# Altium PCB InvertorPCB.PcbDoc
Units mm, origin at the board's own origin, x right, y up, seen from the top; angles counter-clockwise.
Board outline 160.39 x 100.35 mm, 2 copper layers (Top Layer, Bottom Layer); 110 components, 60 nets, 326 pads, 6 vias.
Unrouted connection lines stored in the file: 91.
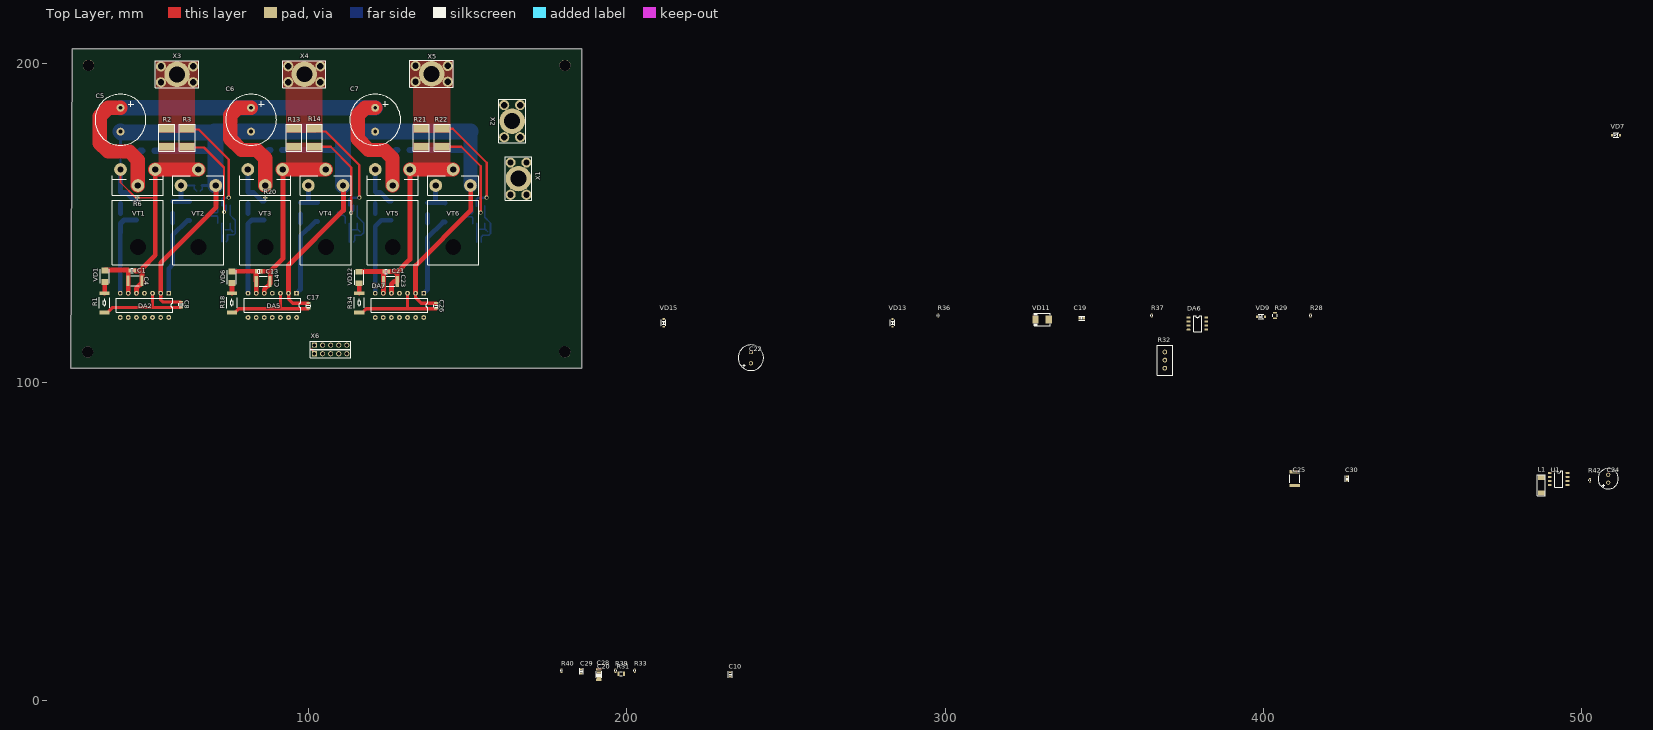
[diagram p0: Top Layer view]
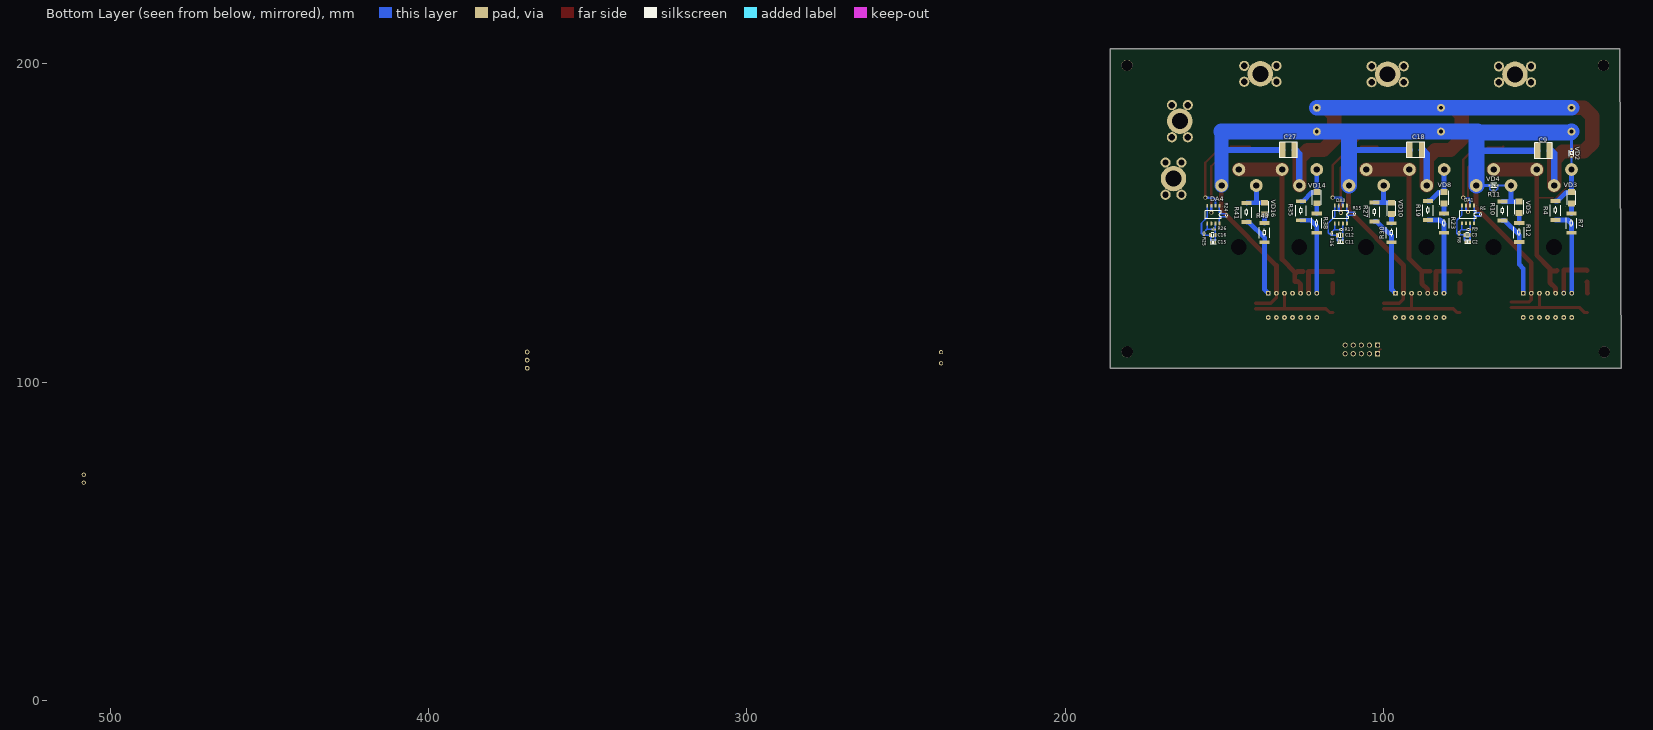
[diagram p1: Bottom Layer view, seen from below]

## Layer stack, top to bottom
Top Solder: solder mask 0.0102, Solder Resist, Dk 3.5
Top Layer: signal copper 0.0356
Dielectric 1: dielectric 0.32, FR-4, Dk 4.8
Bottom Layer: signal copper 0.0356
Bottom Solder: solder mask 0.0102, Solder Resist, Dk 3.5

## Board outline
25.807,204.75 185.8,204.75 185.8,104.4 25.411,104.4

## Design rules (kind name [scope] priority, off if disabled: settings)
Clearance Clearance_1 [InNetClass('Transistor')] p1: gap=1 ignorepadtopadclearanceinfootprint=FALSE
Clearance [All] p2: gap=0.254 ignorepadtopadclearanceinfootprint=FALSE except(0.127: SMDPad-SMDPad; 0.2: Track-Track)
PlaneConnect [All] p1: planeconnectstyle=Direct reliefexpansion=0.508 reliefentries=4 reliefconductorwidth=0.254 reliefairgap=0.254
PolygonConnect [All] p1: connectstyle=Direct reliefconductorwidth=0.254 reliefentries=4 polygonreliefangle="90 Angle" airgapwidth=0.254
RoutingVias [All] p1: holewidth=0.711 width=1.27 viastyle="Through Hole" minholewidth=0.2 minwidth=0.4 maxholewidth=0.711 maxwidth=1.27
SolderMaskExpansion [All] p1: expansion=0.102 istentingtop=FALSE
Width [All] p1: maxlimit=20 minlimit=0.2 preferedwidth=0.254
29 further rules are at their usual default settings.

## Components (designator, comment, footprint, x,y, rotation, side; value= is the part's Value field where it differs from the comment)
C1 "Capacitor" 0805 44.675,135.184 r180 top value="0.1 мкФ"
C2 "Capacitor" C0603C 73.585,144.12 r180 bottom value="0.1 мкФ"
C3 "Capacitor" 0805 73.74,146.301 r180 bottom value="10 мкФ"
C4 "Capacitor" 1812С 45.575,131.951 r0 top value="2.2 мкФ"
C5 "Сapacitor pol" CAP-10 41,182.5 r270 top value=470мкФ
C6 "Сapacitor pol" CAP-10 82,182.5 r270 top value=470мкФ
C7 "Сapacitor pol" CAP-10 121,182.5 r270 top value=470мкФ
C8 "Capacitor" 0805 59.981,124.453 r270 top value="0.47 мкФ"
C9 "Capacitor" 2220С 49.778,172.702 r180 bottom value="4.7 мкФ"
C10 "Capacitor" C0603C 232.5,8.25 r90 top value="0.1 мкФ"
C11 "Capacitor" C0603C 113.573,144.081 r180 bottom value="0.1 мкФ"
C12 "Capacitor" 0805 113.722,146.197 r180 bottom value="10 мкФ"
C13 "Capacitor" 0805 84.467,134.908 r180 top value="0.1 мкФ"
C14 "Capacitor" 1812С 85.796,131.712 r0 top value="2.2 мкФ"
C15 "Capacitor" C0603C 153.543,144 r180 bottom value="0.1 мкФ"
C16 "Capacitor" 0805 153.711,146.261 r180 bottom value="10 мкФ"
C17 "Capacitor" 0805 100,124 r270 top value="0.47 мкФ"
C18 "Capacitor" 2220С 89.9,173 r180 bottom value="4.7 мкФ"
C19 "Capacitor" C0603C 342.9,120.122 r0 top value="0.1 мкФ"
C20 "" C0805C 191.25,8 r90 top value=10nF
C21 "Capacitor" 0805 124.44,134.812 r180 top value="0.1 мкФ"
C22 "" CAP-8x12 239,107.75 r90 top value=220uF
C23 "Capacitor" 1812С 125.761,131.712 r0 top value="2.2 мкФ"
C24 "" CAP-К50-35 508.249,69.75 r90 top value=22uF
C25 "" C1812C 409.749,69.75 r90 top value=2.2uF
C26 "Capacitor" 0805 140.143,124 r270 top value="0.47 мкФ"
C27 "Capacitor" 2220С 129.875,173 r180 bottom value="4.7 мкФ"
C28 "Capacitor" C1206C 191.25,8.25 r90 top value=1нф
C29 "Capacitor" C0603C 185.75,9.25 r90 top value="0.1 мкФ"
C30 "Capacitor" C0603C 426.249,69.75 r90 top value="0.1 мкФ"
DA1 "AD623ARZ" SO8 73.5,152.75 r270 bottom
DA2 "IR2010PFB" DIP14 56.145,128.018 r270 top
DA3 "AD623ARZ" SO8 113.458,152.728 r270 bottom
DA4 "AD623ARZ" SO8 153.482,152.693 r270 bottom
DA5 "IR2010PFB" DIP14 96.3,128.004 r270 top
DA6 "LM393DT" SO8 379.222,118.471 r0 top
DA7 "IR2010PFB" DIP14 136.229,128.001 r270 top
L1 "" IND0488-G-E 487.249,65.25 r90 top value=22uH
R1 "Resistor" 2512R 36,125 r270 top value=100Ом
R2 "Resistor" 2816R 55.5,176.825 r90 top value=20мОм
R3 "Resistor" 2816R 61.897,176.825 r90 top value=20мОм
R4 "Resistor" 2512R 46,154 r270 bottom value=43Ом
R5 "Resistor" 0402R 69.5,152.75 r90 bottom value=11кОм
R6 "Resistor" 0402R 46.263,158.023 r0 top value=10кОм
R7 "Resistor" 2512R 41,150 r270 bottom value=20Ом
R8 "Resistor" 0402R 76.269,146.844 r90 bottom value=20кОм
R9 "Resistor" 0402R 73.335,148 r180 bottom value=10кОм
R10 "Resistor" 2512R 62.631,153.841 r270 bottom value=43Ом
R11 "Resistor" 0402R 65.5,160 r0 bottom value=10кОм
R12 "Resistor" 2512R 57.434,147.097 r270 bottom value=20Ом
R13 "Resistor" 2816R 95.479,176.828 r90 top value=20мОм
R14 "Resistor" 2816R 101.938,176.828 r90 top value=20мОм
R15 "Resistor" 0402R 109.097,152.985 r90 bottom value=11кОм
R16 "Resistor" 0402R 116.229,146.771 r90 bottom value=10кОм
R17 "Resistor" 0402R 113.323,148 r180 bottom value=10кОм
R18 "Resistor" 2512R 76,125 r270 top value=100Ом
R19 "Resistor" 2512R 86.108,154 r270 bottom value=43Ом
R20 "Resistor" 0402R 86.455,157.978 r0 top value=10кОм
R21 "Resistor" 2816R 135.5,176.825 r90 top value=20мОм
R22 "Resistor" 2816R 142,176.825 r90 top value=20мОм
R23 "Resistor" 2512R 81,150 r270 bottom value=20Ом
R24 "Resistor" 0402R 149.326,152.514 r90 bottom value=11кОм
R25 "Resistor" 0402R 156.389,146.749 r90 bottom value=10кОм
R26 "Resistor" 0402R 153.343,148.067 r180 bottom value=10кОм
R27 "Resistor" 2512R 102.837,153.493 r270 bottom value=43Ом
R28 "Resistor" 0402R 414.782,121.011 r90 top value=10кОм
R29 "" C0805R 403.606,121.011 r90 top value=1.1k
R30 "Resistor" 2512R 97.491,147.011 r270 bottom value=20Ом
R31 "" C0805R 198.25,8.5 r0 top value=9.1k
R32 "pot" 3296W 369,107 r90 top
R33 "Resistor" 0402R 202.5,9.5 r90 top value=75кОм
R34 "Resistor" 2512R 116,125 r270 top value=100Ом
R35 "Resistor" 2512R 126,153.9 r270 bottom value=43Ом
R36 "Resistor" 0402R 297.815,121.011 r90 top value=10кОм
R37 "Resistor" 0402R 364.871,121.011 r90 top value=2.2кОм
R38 "Resistor" 2512R 121,150 r270 bottom value=20Ом
R39 "Resistor" 0402R 196.5,9.5 r90 top value=2.2кОм
R40 "Resistor" 0402R 179.5,9.5 r90 top value=2.2кОм
R41 "Resistor" 2512R 143.022,153.362 r270 bottom value=43Ом
R42 "Resistor" 0402R 502.499,69.25 r90 top value=10кОм
R43 "Resistor" 2512R 137.44,147.015 r270 bottom value=20Ом
U1 "LM22675MR-5.0" LM22675MR-5.0/NOPB 492.749,69.5 r0 top
VD1 "STPS2H100A" D0-124AC 36.103,133.354 r270 top
VD2 "BZX384-C18" SOD323 41,172 r90 bottom
VD3 "VS-10BQ040" D0-124AC 41,158 r90 bottom
VD4 "BZX384-C18" SOD323 65.45,161.85 r0 bottom
VD5 "VS-10BQ040" D0-124AC 57.434,154.999 r90 bottom
VD6 "STPS2H100A" D0-124AC 76,133 r270 top
VD7 "BZX384-C18" SOD323 510.7,177.63 r0 top
VD8 "VS-10BQ040" D0-124AC 81,157.966 r90 bottom
VD9 "BZX384-C18" SOD323 399.161,120.63 r0 top
VD10 "VS-10BQ040" D0-124AC 97.531,154.654 r90 bottom
VD11 "" DO-214AA 330.454,119.741 r0 top
VD12 "STPS2H100A" D0-124AC 115.952,132.945 r270 top
VD13 "BZX384-C18" SOD323 283.464,118.725 r90 top
VD14 "VS-10BQ040" D0-124AC 121,158.03 r90 bottom
VD15 "BZX384-C18" SOD323 211.582,118.725 r90 top
VD16 "VS-10BQ040" D0-124AC 137.44,154.615 r90 bottom
VT1 "IRFP4710PBF" TO247-2 46.456,161.844 r180 top
VT2 "IRFP4710PBF" TO247-1 65.45,161.85 r180 top
VT3 "IRFP4710PBF" TO247-2 86.45,161.85 r180 top
VT4 "IRFP4710PBF" TO247-1 105.445,161.85 r180 top
VT5 "IRFP4710PBF" TO247-2 126.45,161.85 r180 top
VT6 "IRFP4710PBF" TO247-1 145.45,161.85 r180 top
X1 "Connector-1" PCBM4 166,164 r270 top
X2 "Connector-1" PCBM4 164,182.05 r270 top
X3 "Connector-1_1" PCBM4 58.75,196.75 r0 top
X4 "Connector-1_1" PCBM4 98.735,196.789 r0 top
X5 "Connector-1_1" PCBM4 138.719,196.913 r0 top
X6 "PLS-2x5" PLS-2x5 107,111.7 r180 top

## Footprints (in the part's own frame and the unit in brackets; to place one, negate y for a bottom-side part, rotate by r counter-clockwise, add the part's x,y. Pads: shape width x height; smd on the part's side, far side on the other; paste and mask are expansions set on the pad)
0402R [mm]
  rect 0.4x0.6 smd: 1(-0.5,0) 2(0.5,0)
  silkscreen extent -0.2,-0.3 0.2,0.3, body extent -0.52,-0.3 0.52,0.3, height 0.34
0805 [mm]
  rect 0.6x1.3 smd: 1(-0.875,0) 2(0.875,0)
  silkscreen extent -0.4,-0.7 0.4,0.7, body extent -1,-0.6 1,0.6, height 0.8
1812С [mm]
  rect 1x3.35 smd: 1(-2.175,0) 2(2.175,0)
  silkscreen extent -1.3,-1.58 1.3,1.58, body extent -2.25,-1.6 2.25,1.6, height 1
2220С [mm]
  rect 1.8x5 smd: 1(-1.9,0) 2(1.9,0)
  silkscreen extent -2.8,-2.5 2.8,2.5
2512R [mm]
  rect 1.2x3.2 smd: 1(-3,0) 2(3,0)
  silkscreen extent -1.73,-1.63 1.75,1.63, body extent -3.2,-1.6 3.2,1.6, height 0.55
2816R [mm]
  rect 2.45x4.7 smd: 1(-2.825,0) 2(2.825,0)
  silkscreen extent -4.2,-2.5 4.2,2.5
3296W [mm]
  round 1.5 hole 0.8: 1(2.54,0) 2(0,0) 3(-2.54,0)
  silkscreen extent -4.77,-2.45 4.72,2.37, body extent -4.77,-2.43 4.76,2.4, height 11.52
C0603C [mm]
  rect 0.5x0.8 smd: 1(-0.7,0) 2(0.7,0)
  silkscreen extent -0.97,-0.58 0.97,0.58, body extent -0.8,-0.4 0.8,0.4, height 0.5
C0805C [mm]
  rect 0.6x1.3 smd: 1(-0.875,0) 2(0.875,0)
  silkscreen extent -0.4,-0.7 0.4,0.7, body extent -1,-0.6 1,0.6, height 0.8
C0805R [mm]
  rect 0.6x1.3 smd: 1(-0.875,0) 2(0.875,0)
  silkscreen extent -0.4,-0.7 0.4,0.7, body extent -1,-0.6 1,0.6, height 0.5
C1206C [mm]
  rect 0.8x1.7 smd: 1(-1.6,0) 2(1.6,0)
  silkscreen extent -1,-0.9 1,0.9, body extent -1.7,-0.8 1.7,0.8, height 0.8
C1812C [mm]
  rect 1x3.35 smd: 1(-2.175,0) 2(2.175,0)
  silkscreen extent -1.3,-1.58 1.3,1.58, body extent -2.25,-1.6 2.25,1.6, height 1
CAP-8x12 [mm]
  round 1.3 hole 0.8: 1(-1.75,0) 2(1.75,0)
  silkscreen extent -4,-4 4,4
CAP-10 [mm]
  round 2.5 hole 1.2: 1(-3.75,0) 2(3.75,0)
  silkscreen extent -8,-8 8,8
CAP-К50-35 [mm]
  round 1.3 hole 0.8: 1(-1.25,0) 2(1.25,0)
  silkscreen extent -3.2,-3.2 3.2,3.2
D0-124AC [mm]
  rect 1.8x2.2 smd: A(1.8,0) C(-1.8,0)
  silkscreen extent -2.25,-1.4 2.25,1.4, body extent -2.47,-1.4 2.47,1.4, height 2.4
DIP14 [mm]
  rect 1.5x1.5 hole 0.7: 1(0,0)
  round 1.5 hole 0.7: 2(0,-2.54) 3(0,-5.08) 4(0,-7.62) 5(0,-10.16) 6(0,-12.7) 7(0,-15.24) 8(7.62,-15.24) 9(7.62,-12.7) 10(7.62,-10.16) 11(7.62,-7.62) 12(7.62,-5.08) 13(7.62,-2.54) 14(7.62,0)
  silkscreen extent 1.58,-16.51 6.04,1.27
DO-214AA [mm]
  rect 2x2.5 smd: A(2.1,0) C(-2.1,0)
  silkscreen extent -2.5,-1.9 2.5,1.9, body extent -2.97,-1.8 2.97,1.8, height 2.3
IND0488-G-E [mm]
  rect 1.5x2.2 smd: 1(0,0) 2(4.9,0)
  silkscreen extent -0.89,-1.27 5.71,1.27
LM22675MR-5.0/NOPB [mm]
  rrect50% 1.2x0.6 smd: 1(-2.858,2.086) 2(-2.858,0.816) 3(-2.858,-0.454) 4(-2.858,-1.724) 5(2.73,-1.724) 6(2.73,-0.454) 7(2.73,0.816) 8(2.73,2.086)
  silkscreen extent -1.29,-2.36 1.25,2.72, body extent -3.13,-2.26 3,2.63, height 1.76
PCBM4 [mm]
  round 3.2 hole 2: 1(-5.05,2.5) 1(-5.05,-2.5) 1(5.05,2.5) 1(5.05,-2.5)
  round 8 hole 5: 1(0,0)
  Top Layer region: -5.3,7.2
  Top Layer region: -5.3,7.2
  silkscreen extent -6.8,-4.2 6.8,4.2
PLS-2x5 [mm]
  rect 1.6x1.6 hole 1.1: 1(5.08,0) 6(5.08,2.7)
  round 1.6 hole 1.1: 2(2.54,0) 3(0,0) 4(-2.54,0) 5(-5.08,0) 7(2.54,2.7) 8(0,2.7) 9(-2.54,2.7) 10(-5.08,2.7)
  silkscreen extent -6.35,-1.27 6.35,3.97, body extent -6.35,-1.27 6.35,3.97, height 8.5
SO8 [mm]
  rrect50% 1.2x0.6 smd: 1(-2.794,1.905) 2(-2.794,0.635) 3(-2.794,-0.635) 4(-2.794,-1.905) 5(2.794,-1.905) 6(2.794,-0.635) 7(2.794,0.635) 8(2.794,1.905)
  silkscreen extent -1.23,-2.55 1.31,2.53, body extent -3.07,-2.44 3.07,2.45, height 1.76
SOD323 [mm]
  rrect25% 0.6x0.7 smd: A(1.25,0) C(-1.25,0)
  silkscreen extent -0.9,-0.7 0.9,0.7, body extent -1.3,-0.68 1.3,0.67, height 1.1
TO247-1 [mm]
  round 4 hole 5 unplated: 4(-0.05,19.35)
  round 4 hole 2: D(0,-5) G(5.45,0) S(-5.45,0)
  silkscreen extent -8,-3 8,24.9, body extent -7.5,-5.2 7.5,3, height 26.15
TO247-2 [mm]
  round 4 hole 5 unplated: 4(-0.05,19.35)
  round 4 hole 2: D(0,0) G(5.45,-5) S(-5.45,-5)
  silkscreen extent -8,-3 8,24.9, body extent -7.5,-5.2 7.5,3, height 26.15

## Part data
C20 C25: library part Cap, ComponentLink1Description="New link"
  C20: ComponentLink1URL=https://www.chipdip.ru/product/grm216r71h103k
  C25: ComponentLink1URL=https://www.chipdip.ru/product0/9000144596
C22 C24: library part CapPol, ComponentLink1Description="New link"
  C22: ComponentLink1URL=https://www.chipdip.ru/product0/9000565758
  C24: ComponentLink1URL=https://www.chipdip.ru/product0/9000565851
DA1 DA3 DA4: library part AD623ARZ-R7, ComponentLink1Description="Product link", ComponentLink1URL=https://www.platan.ru/cgi-bin/qwery.pl/id=2010029983, Datasheet=https://doc.platan.ru/pdf/datasheets/analogdevices/AD623-877194.pdf
  DA1: ComponentLink2Description="Droduct link 2", ComponentLink2URL=https://www.platan.ru/cgi-bin/qwery.pl/id=2011915272
DA2 DA5 DA7: library part IR2010SPFB, ComponentLink1Description="Product link", ComponentLink1URL=https://www.chipdip.ru/product/ir2010
DA6: library part Comparator, ComponentLink1Description="Product link", ComponentLink1URL=https://www.chipdip.ru/product/lm393d-stm
L1: library part Inductor, ComponentLink1Description="New link", ComponentLink1URL=https://www.chipdip.ru/product/b82472g6223m000-22
R1 R4 R7 R10 R12 R18 R19 R23 R27 R30 R34 R35 R38 R41 R43: Power=1Вт, ComponentLink1Description="Product link"
  R1 R18 R34: ComponentLink1URL=https://www.chipdip.ru/product0/9000189977
  R4 R10 R19 R27 R35 R41: ComponentLink1URL=https://www.chipdip.ru/product0/9000190080
  R7 R12 R23 R30 R38 R43: ComponentLink1URL=https://www.chipdip.ru/product0/9000190063
R2 R3 R13 R14 R21 R22: Power=2В, ComponentLink1Description="Product link", ComponentLink1URL=https://www.platan.ru/cgi-bin/qwery.pl/id=224066896
R6 R8 R9 R11 R16 R17 R20 R25 R26 R28 R33 R36 R37 R39 R40 R42: Power=0.062, ComponentLink1Description="Product link"
  R6 R8 R9 R11 R16 R17 R20 R25 R26 R28 R36 R42: ComponentLink1URL=https://www.chipdip.ru/product0/9000189664
  R33: ComponentLink1URL=https://www.chipdip.ru/product0/9000189752
  R37 R39 R40: ComponentLink1URL=https://www.chipdip.ru/product0/9000189810
R29 R31: library part res, ComponentLink1Description="New link"
  R29: ComponentLink1URL=https://www.chipdip.ru/product0/9000079487
  R31: ComponentLink1URL=https://www.chipdip.ru/product0/9000079513
U1: library part LM22675MR-5.0/NOPB, ComponentLink1Description="New link", ComponentLink1URL=https://www.chipdip.ru/product/lm22675mr-5.0-nopb-2
VD1 VD6 VD12: library part "Bootstrap diode", ComponentLink1Description="Product link", ComponentLink1URL=https://www.chipdip.ru/product/stps2h100a-2
VD2 VD4 VD7 VD9 VD13 VD15: library part "Zener diode", ComponentLink1Description="Product link", ComponentLink1URL=https://www.chipdip.ru/product/bzx384-c18.115
VD3 VD5 VD8 VD10 VD14 VD16: library part Shotki, ComponentLink1Description="Product link", ComponentLink1URL=https://www.chipdip.ru/product/10bq040
VD11: library part DIODE, ComponentLink1Description="New link", ComponentLink1URL=https://www.chipdip.ru/product/sk16-diotec
VT1 VT2 VT3 VT4 VT5 VT6: library part N-MOSFET, ComponentLink1Description="Product link", ComponentLink1URL=https://www.chipdip.ru/product/irfp4710pbf
C1 C13 C21: ComponentLink1Description="Product link", ComponentLink1URL=https://www.chipdip.ru/product/grm219f51h104z
C2 C10 C11 C15 C19 C29 C30: ComponentLink1Description="Product link", ComponentLink1URL=https://www.chipdip.ru/product0/9000591947
C3 C12 C16: ComponentLink1Description="Product link", ComponentLink1URL=https://www.chipdip.ru/product0/9000671061
C4 C14 C23: ComponentLink1Description="Product link", ComponentLink1URL=https://www.chipdip.ru/product0/9000144596
C5 C6 C7: ComponentLink1Description="Product link", ComponentLink1URL=https://www.chipdip.ru/product0/9000565913
C8 C17 C26: ComponentLink1Description="Product link", ComponentLink1URL=https://www.chipdip.ru/product/grm21bf51e474z
C9 C18 C27: ComponentLink1Description="Product link", ComponentLink1URL=https://www.chipdip.ru/product0/8001641628
C28: ComponentLink1Description="Product link", ComponentLink1URL=https://www.chipdip.ru/product/grm319r71h102k
R5 R15 R24: ComponentLink1Description="Product link", ComponentLink1URL=https://www.chipdip.ru/product0/9000189841
R32: ComponentLink1Description="Product link", ComponentLink1URL=https://www.chipdip.ru/product/3296w-1-103
X1: ComponentLink1Description="Product link", Name=+АКБ
X2: ComponentLink1Description="Product link", Name=GND
X3: ComponentLink1Description="Product link", Name="Фаза А"
X4: ComponentLink1Description="Product link", Name="Фаза B"
X5: ComponentLink1Description="Product link", Name="Фаза C"
X6: ComponentLink1Description="Product link"

## Free pads (board coordinates)
  round 3.5 hole 3.5 unplated: 3(30.695,109.571) 3(30.971,199.573) 3(180.541,109.609) 3(180.592,199.577)

## Via types
v1: diameter 1.27, hole 0.711, Top Layer to Bottom Layer, 6 vias

## Nets (pads, with @x,y where several pads share a name; then routed paths per layer and width w, separated by ;. In a path a pad name is that pad's centre, name@x,y a point inside that pad or via, vN(x,y) a via of type N, cw(c..) or ccw(c..) an arc to the next point about the centre after c; other vN are vias at no path point)
+3.3: C10.2 C19.2 C30.2 DA2.9 DA5.9 DA7.9 R33.2
+5: C2.2 C3.2 C11.2 C12.2 C15.2 C16.2 C29.1 DA1.7 DA3.7 DA4.7 DA6.8 R9.2 R17.2 R26.2 R32.1 | length 17.6
  Bottom Layer w0.5: DA1.7 72.85,149.941 72.85,148.015 R9.2 72.85,147.985 72.85,146.316 C3.2 72.865,144.29 72.885,144.27 C2.2 ; DA3.7 R17.2 112.835,147.988 112.835,146.208 C12.2 112.873,146.17 C11.2 ; C15.2 152.843,144.15 152.836,144.157 C16.2 152.84,146.264 152.84,148.064 R26.2 152.845,148.069 152.845,149.897 DA4.7
+12: C8.2 C17.2 C22.1 C26.2 DA2.3 DA5.3 DA7.3 L1.2 R1.2 R18.2 R31.2 R34.2 | length 87.9
  Top Layer w1: R1.2 37,122 38.541,123.541 51.065,123.541 ; DA2.3 51.065,123.541 ; C8.2@59.981,123.541 51.065,123.541 ; R18.2 77,122 78.125,123.125 91.22,123.125 ; DA5.3 91.22,123.125 ; C17.2 91.22,123.125 ; R34.2 117,122 118.125,123.125 131.149,123.125 ; DA7.3 131.149,123.125 ; C26.2 131.149,123.125
+VM: C5.1 C6.1 C7.1 C9.2 C18.2 C24.1 C25.1 C27.2 U1.7 VT1.D VT3.D VT5.D X1.1 | length 226.9
  Top Layer w4.5: C5.1 37.136,186.25 34.5,183.614 34.5,175.136 37.136,172.5 43.82,172.5 46.456,169.864 VT1.D ; C6.1 77.886,186.25 75.5,183.864 75.5,176.5 79,173 83.814,173 86.45,170.364 VT3.D ; C7.1 117.886,186.25 115.5,183.864 115.5,176.5 119,173 123.814,173 126.45,170.364 VT5.D
  Bottom Layer w2: VT1.D 46.456,171.986 47.172,172.702 C9.2 ; VT3.D@86.509,161.909 VT3.D 86.45,171.828 87.622,173 C18.2 ; VT5.D 126.45,171.828 127.622,173 C27.2
  Bottom Layer w3: VT1.D VT1.D@46.491,161.879
  Bottom Layer w5: C5.1 C6.1 C7.1
AH: DA2.10 X6.1
AL: DA2.12 X6.6 | length 2.1
  Top Layer w0.5: 100.698,110.396 101.077,110.396 101.37,110.103 101.37,109.55 X6.6
BH: DA5.10 X6.2
BL: DA5.12 X6.7
CH: DA7.10 X6.3
CL: DA7.12 X6.8
Current_A_out: DA1.6 X6.4
Current_B_out: DA3.6 X6.5
Current_C_out: DA4.6 X6.9
GND: C2.1 C3.1 C10.1 C11.1 C12.1 C15.1 C16.1 C19.1 C28.1 C29.2 C30.1 DA1.4 DA2.13 DA3.4 DA4.4 DA5.13 DA6.4 DA7.13 R8.1 R16.1 R25.1 R32.3 | length 43.9
  Bottom Layer w0.5: C2.1 74.285,144.27 74.615,144.599 C3.1 74.636,146.322 76.247,146.322 R8.1 76.674,146.344 77.073,146.743 77.073,150.927 75.405,152.595 DA1.4 ; C11.1 114.273,144.231 114.597,144.555 C12.1 116.555,146.197 117.371,147.013 117.371,150.089 115.363,152.097 DA3.4 ; C15.1 154.243,145.568 154.586,145.911 C16.1 154.592,146.255 156.383,146.255 R25.1 156.691,146.249 157.193,146.751 157.193,150.041 155.387,151.847 DA4.4
I_A: C1.1 C4.2 DA1.3 DA2.5 R2.1 R3.1 R6.2 R37.1 VT1.S VT2.D | length 92.7
  Top Layer w0.5: R6.2 51.803,158.023 51.906,158.126
  Top Layer w0.7: R3.1@62.447,174 62.697,173.75 67.25,173.75 73.504,167.496 73.504,153.454 v1(73.5,153.45)
  Top Layer w1.5: C1.1 45.709,135.025 47.159,135.025 47.75,134.434 ; DA2.5 45.985,129.512 47.75,131.276 C4.2 47.75,134.434 ; VT1.S 51.906,158.126 51.906,139.906 47.75,135.75 47.75,134.434
  Top Layer w4.5: VT1.S 65.444,166.844 VT2.D
  Bottom Layer w0.7: v1(73.5,153.45) 73.5,153.488 74.135,154.123 DA1.3 DA1.3@74.126,155.553
I_B: C13.1 C14.2 DA3.3 DA5.5 R13.1 R14.1 R20.2 R39.1 VT3.S VT4.D | length 88.5
  Top Layer w0.7: R14.1 106.997,174.003 113.499,167.501 113.499,153.326 v1(113.458,153.285)
  Top Layer w1.5: C13.1 88,134.908 ; DA5.5 86.14,129.206 87.971,131.037 C14.2 88,131.74 88,134.908 ; VT3.S 92,166.75 92,138.908 88,134.908
  Top Layer w4.5: VT3.S VT4.D
  Bottom Layer w0.7: v1(113.458,153.285) 113.458,153.324 114.093,153.959 DA3.3
I_C: C21.1 C23.2 DA4.3 DA7.5 R21.1 R22.1 R36.2 R40.1 VT5.S VT6.D | length 89.4
  Top Layer w0.7: R22.1 148,174 154.117,167.883 v1(154.117,153.293)
  Top Layer w1.5: C21.1 127.057,134.812 127.936,133.934 C23.2 126.947,131.712 126.069,130.833 DA7.5 ; 127.722,134.426 131.9,138.604 VT5.S
  Top Layer w4.5: VT5.S VT6.D
  Bottom Layer w0.7: v1(154.117,153.293) DA4.3
NetC1_2: C1.2 C4.1 DA2.6 VD1.C | length 14.7
  Top Layer w1.5: VD1.C 36.239,135.29 43.4,135.29 C4.1 43.4,128.064 DA2.6
  Bottom Layer w1.5: DA2.6@43.425,128.038 DA2.6
NetC13_2: C13.2 C14.1 DA5.6 VD6.C | length 14.6
  Top Layer w1.5: VD6.C 76.108,134.908 C13.2 83.592,131.741 C14.1 83.6,131.691 DA5.6
NetC20_1: C20.1 U1.1
NetC20_2: C20.2 L1.1 U1.8 VD11.C
NetC21_2: C21.2 C23.1 DA7.6 VD12.C | length 14.5
  Top Layer w1.5: VD12.C 116.019,134.812 C21.2 123.565,131.733 C23.1 123.586,128.058 DA7.6
NetC28_2: C28.2 DA6.3 R33.1 R37.2 R39.2 R40.2
NetDA1_1: DA1.1 R5.2 | length 4.2
  Bottom Layer w0.5: R5.2 71.245,153.25 71.595,153.6 DA1.1
NetDA1_5: DA1.5 R8.2 R9.1 | length 4.7
  Bottom Layer w0.5: R9.1 75.612,148 ; DA1.5 75.405,148.207 75.612,148 ; R8.2 75.612,148
NetDA1_8: DA1.8 R5.1 | length 4.2
  Bottom Layer w0.5: R5.1 71.295,152.25 71.595,151.95 DA1.8
NetDA2_1: DA2.1 R10.2 R12.2 | length 25.9
  Bottom Layer w1.5: DA2.1 56.145,135.763 57.434,137.052 R12.2 57.434,146.344 61.931,150.841 R10.2
NetDA2_7: DA2.7 R4.2 R7.2 | length 27.4
  Bottom Layer w1.5: DA2.7 40.905,146.905 R7.2 41,149.905 42.095,151 R4.2
NetDA3_1: DA3.1 R15.2 | length 4.3
  Bottom Layer w0.5: R15.2 111.203,153.485 111.553,153.835 DA3.1
NetDA3_5: DA3.5 R16.2 R17.1 | length 4.7
  Bottom Layer w0.5: R17.1 115.5,148 ; DA3.5 115.363,148.137 115.5,148 ; R16.2 115.5,148
NetDA3_8: DA3.8 R15.1 | length 4.7
  Bottom Layer w0.5: R15.1 111.003,152.485 111.553,151.935 DA3.8
NetDA4_1: DA4.1 R24.2 | length 4.6
  Bottom Layer w0.5: R24.2 149.34,153 151.284,153 151.577,153.293 DA4.1
NetDA4_5: DA4.5 R25.2 R26.1 | length 4.8
  Bottom Layer w0.5: R26.1 155.571,148.067 ; DA4.5 155.387,148.251 155.571,148.067 ; R25.2 155.571,148.067
NetDA4_8: DA4.8 R24.1 | length 4.2
  Bottom Layer w0.5: R24.1 151.284,152.014 151.577,151.721 DA4.8
NetDA5_1: DA5.1 R27.2 R30.2 | length 25.7
  Bottom Layer w1.5: DA5.1 97.511,129.215 97.511,146 99.683,148.171 99.815,148.171 102.137,150.493 R27.2
NetDA5_7: DA5.7 R19.2 R23.2 | length 27.4
  Bottom Layer w1.5: R23.2 81,149.781 82.219,151 R19.2 ; DA5.7 R23.2@81.06,147.06
NetDA6_2: DA6.2 R32.2
NetDA7_1: DA7.1 R41.2 R43.2 | length 25.3
  Bottom Layer w1.5: DA7.1 137.44,129.212 R43.2 ; R43.2@137.327,144.308 137.327,145.367 142.322,150.362 R41.2
NetDA7_7: DA7.7 R35.2 R38.2 | length 26.8
  Bottom Layer w1.5: DA7.7@121,128.012 DA7.7 120.989,146.989 R38.2 121,149 122.9,150.9 R35.2
NetR1_1: R1.1 VD1.A | length 3.6
  Top Layer w1.5: R1.1 36.052,128.052 36.052,131.502 VD1.A
NetR4_1: R4.1 R6.1 VD2.C VD3.A VT1.G | length 27.9
  Top Layer w0.5: VT1.G 41.006,162.779 R6.1
  Bottom Layer w0.7: VD2.C 41,166.85 VT1.G
  Bottom Layer w1.5: VT1.G 41.003,166.841 41.003,159.803 VD3.A 41.15,159.65 42.65,159.65 45.3,157 R4.1
NetR7_1: R7.1 VD3.C | length 3.2
  Bottom Layer w1.5: R7.1 VD3.C
NetR10_1: R10.1 R11.1 VD4.C VD5.A VT2.G | length 16.6
  Bottom Layer w0.5: VD4.C 64.2,160.8 64.554,160.446 R11.1
  Bottom Layer w0.7: VT2.G VD4.C
  Bottom Layer w1.5: VD5.A 57.454,156.82 60.032,156.82 ; VT2.G 60.032,161.818 60.032,156.82 ; R10.1 62.61,156.82 60.032,156.82
NetR12_1: R12.1 VD5.C | length 3.1
  Bottom Layer w1.5: R12.1 VD5.C
NetR18_1: R18.1 VD6.A | length 3.2
  Top Layer w1.5: R18.1 VD6.A
NetR19_1: R19.1 R20.1 VD7.C VD8.A VT3.G | length 13.3
  Bottom Layer w1.5: VT3.G VD8.A 81.15,159.616 82.792,159.616 85.408,157 R19.1
NetR23_1: R23.1 VD8.C | length 3.2
  Bottom Layer w1.5: R23.1 VD8.C
NetR27_1: R27.1 R28.1 VD9.C VD10.A VT4.G | length 10.7
  Bottom Layer w1.5: VD10.A 97.582,156.505 100,156.505 ; VT4.G 100,161.845 100,156.505 ; R27.1 102.825,156.505 100,156.505
NetR29_2: R29.2 R31.1 U1.4
NetR30_1: R30.1 VD10.C | length 2.9
  Bottom Layer w1.5: R30.1 97.511,150.031 97.511,152.834 VD10.C
NetR34_1: R34.1 VD12.A | length 3.2
  Top Layer w1.5: VD12.A 115.976,131.121 115.976,128.024 R34.1
NetR35_1: R35.1 R36.1 VD13.C VD14.A VT5.G | length 13.2
  Bottom Layer w1.5: VT5.G VD14.A 121.15,159.68 122.52,159.68 125.3,156.9 R35.1
NetR38_1: R38.1 VD14.C | length 3.2
  Bottom Layer w1.5: R38.1 VD14.C
NetR41_1: R41.1 R42.1 VD15.C VD16.A VT6.G | length 11.1
  Bottom Layer w1.5: VD16.A 137.467,156.389 139.951,156.389 ; VT6.G 139.951,161.801 139.951,156.389 ; R41.1 142.995,156.389 139.951,156.389
NetR43_1: R43.1 VD16.C | length 2.8
  Bottom Layer w1.5: R43.1 VD16.C
OutA: DA1.2 R2.2 R3.2 X3.1 | length 32.8
  Top Layer w0.7: R3.2@62.447,179.65 62.697,179.4 65.6,179.4 75,170 v1(75,158)
  Bottom Layer w0.7: DA1.2 72.889,155.568 72.889,157.5 73.315,157.926 74.926,157.926 v1(75,158)
OutB: DA3.2 R13.2 R14.2 X4.1 | length 34.5
  Top Layer w0.7: R14.2 102.813,178.778 105.486,178.778 116,168.264 v1(116,158)
  Bottom Layer w0.7: DA3.2 112.823,157.59 113.233,158 v1(116,158)
OutC: DA4.2 R21.2 R22.2 X5.1 | length 34.8
  Top Layer w0.7: R22.2 145.35,179.65 156,169 v1(156,158)
  Bottom Layer w0.7: DA4.2 152.847,157.59 153.257,158 v1(156,158)
Overcurrent_signal: DA2.11 DA5.11 DA6.1 DA7.11 X6.10
Power_GND: C5.2 C6.2 C7.2 C8.1 C9.1 C17.1 C18.1 C22.2 C24.2 C25.2 C26.1 C27.1 DA2.2 DA5.2 DA7.2 R11.2 R28.2 R29.1 R42.2 U1.6 VD2.A VD4.A VD7.A VD9.A VD11.A VD13.A VD15.A VT2.S VT4.S VT6.S X2.1 | length 380.4
  Top Layer w1: DA2.2 53.659,127.965 53.659,125.877 54.245,125.291 C8.1@59.981,125.291 ; DA5.2 93.856,127.909 93.856,126.144 95.125,124.875 C17.1 ; DA7.2 133.689,126.586 135.399,124.875 C26.1
  Top Layer w1.5: DA2.2 53.605,137.605 71,155 71,161.75 VT2.S ; DA5.2 93.76,136.76 111,154 111,161.745 VT4.S ; DA7.2 133.689,136.689 151,154 151,161.75 VT6.S
  Bottom Layer w0.5: R11.2 66.7,160.7 VD4.A
  Bottom Layer w1: VD2.A C5.2 ; VD4.A VT2.S
  Bottom Layer w2: C9.1 70.642,172.702 70.9,172.96 ; C18.1 109.767,173 110.79,171.978 110.895,172.083 ; C27.1 150.432,173 150.9,173.468
  Bottom Layer w4.5: VT6.S 150.9,173.468 150.9,178.65 151,178.75
  Bottom Layer w5: C5.2 41.244,178.506 70.744,178.506 ; VT2.S 70.9,172.96 70.9,178.35 70.744,178.506 ; VT4.S 110.895,172.083 110.895,178.645 111,178.75 ; 151,178.75 C7.2 111,178.75 ; 70.744,178.506 70.5,178.75 C6.2 111,178.75
pads on no net: DA2.4 DA2.8 DA2.14 DA5.4 DA5.8 DA5.14 DA6.5 DA6.6 DA6.7 DA7.4 DA7.8 DA7.14 U1.2 U1.3 U1.5 VT1.4 VT2.4 VT3.4 VT4.4 VT5.4 VT6.4

## Polygon pours and split planes (outlines as drawn)
OutC on Top Layer "OUTC_L01_P045" (solid, pour order 45): 133.006,178.431 133.008,178.429 144.495,178.429 144.495,192.807 144.5,192.813 145.5,192.813 145.5,201.013 132,201.013 132,192.813 133,192.813
no net on Top Layer "NONET_L01_P044" (solid, pour order 44): 133.15,178.425
no net on Top Layer "NONET_L01_P043" (solid, pour order 43): 133.15,178.425
I_C on Top Layer "I_C_L01_P042" (solid, pour order 42): 133,175.292 144.5,175.296 144.5,165.5 133,165.5
OutB on Top Layer "OUTB_L01_P041" (solid, pour order 41): 92.986,178.406 104.417,178.406 104.438,178.428 104.367,178.5 104.367,192.589 105.535,192.589 105.535,200.989 91.935,200.989 91.935,192.589 92.968,192.589
I_B on Top Layer "I_B_L01_P040" (solid, pour order 40): 93.078,175.327 104.341,175.327 104.341,166.436 104.277,166.5 93,166.5
OutA on Top Layer "OUTA_L01_P038" (solid, pour order 38): 53.013,178.425 64.357,178.425 64.357,192.67 65.421,192.682 65.421,200.821 52.078,200.823 52.078,192.684 53.013,192.687
no net on Top Layer "NONET_L01_P036" (solid, pour order 36): 53.013,178.425
no net on Top Layer "NONET_L01_P034" (solid, pour order 34): 53.4,178.506
I_A on Top Layer "I_A_L01_P033" (solid, pour order 33): 53.071,175.285 64.311,175.285 64.311,165.061 64,164.75 52.989,164.75
no net on Top Layer "NONET_L01_P031" (solid, pour order 31): 54.257,172.8
no net on Top Layer "NONET_L01_P025" (solid, pour order 25): 174.75,93.5
no net on Top Layer "NONET_L01_P022" (solid, pour order 22): 57.25,77.25
no net on Top Layer "NONET_L01_P001" (solid, pour order 1): 75.25,106.75
no net on Bottom Layer "NONET_L02_P046" (solid, pour order 46): 44.112,172.93
no net on Bottom Layer "NONET_L02_P039" (solid, pour order 39): 92.992,175.316
no net on Bottom Layer "NONET_L02_P027" (solid, pour order 27): 166.332,103.4
no net on Top Overlay "NONET_L-01_P-001" (solid): 92.979,178.447

## Silkscreen, mask and mechanical layers (free items; w line width, h text height)
Mechanical 13:
  circle w0.3: c180.541,109.609 r5
  circle w0.3: c30.695,109.571 r5
  circle w0.3: c30.971,199.573 r5
  circle w0.3: c180.592,199.577 r5

## Dimensions
51.906,166.844 to 65.45,166.85 on Top Overlay
185.8,204.75 to 185.8,104.4 on Mechanical 13
25.807,204.75 to 185.8,204.75 on Mechanical 13
73.45,136.95 to 78.45,136.95 on Top Overlay
134.45,136.95 to 137.45,136.95 on Top Overlay